# Altium PCB PogoBattPack.PcbDoc
Units mil, origin at the board's own origin, x right, y up, seen from the top; angles counter-clockwise.
Board outline 1250 x 3255.91 mil, 2 copper layers (Top Layer, Bottom Layer), stack 63.937 mil thick; 4 components, 6 nets, 21 pads, 22 vias.
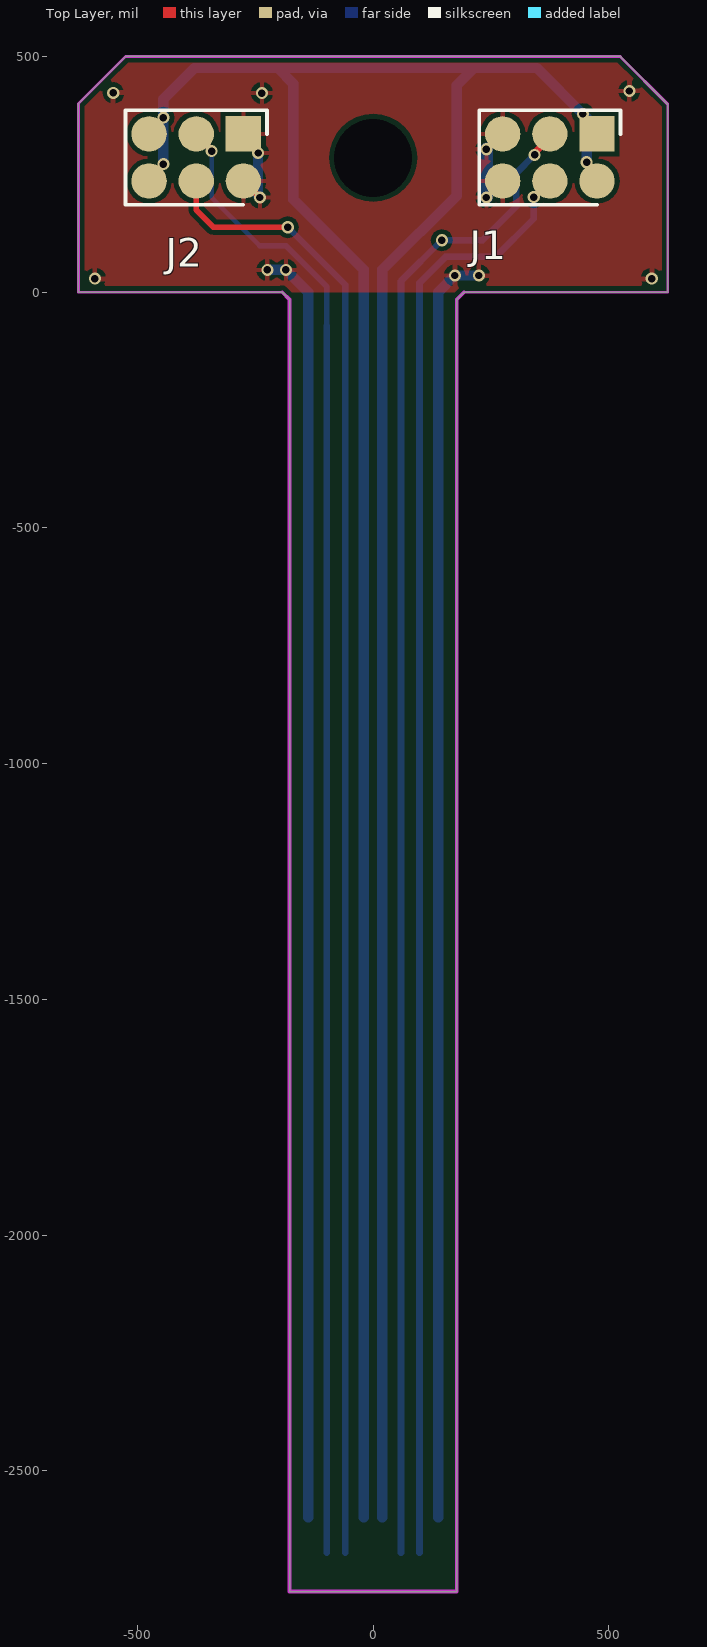
[diagram p0: Top Layer view]
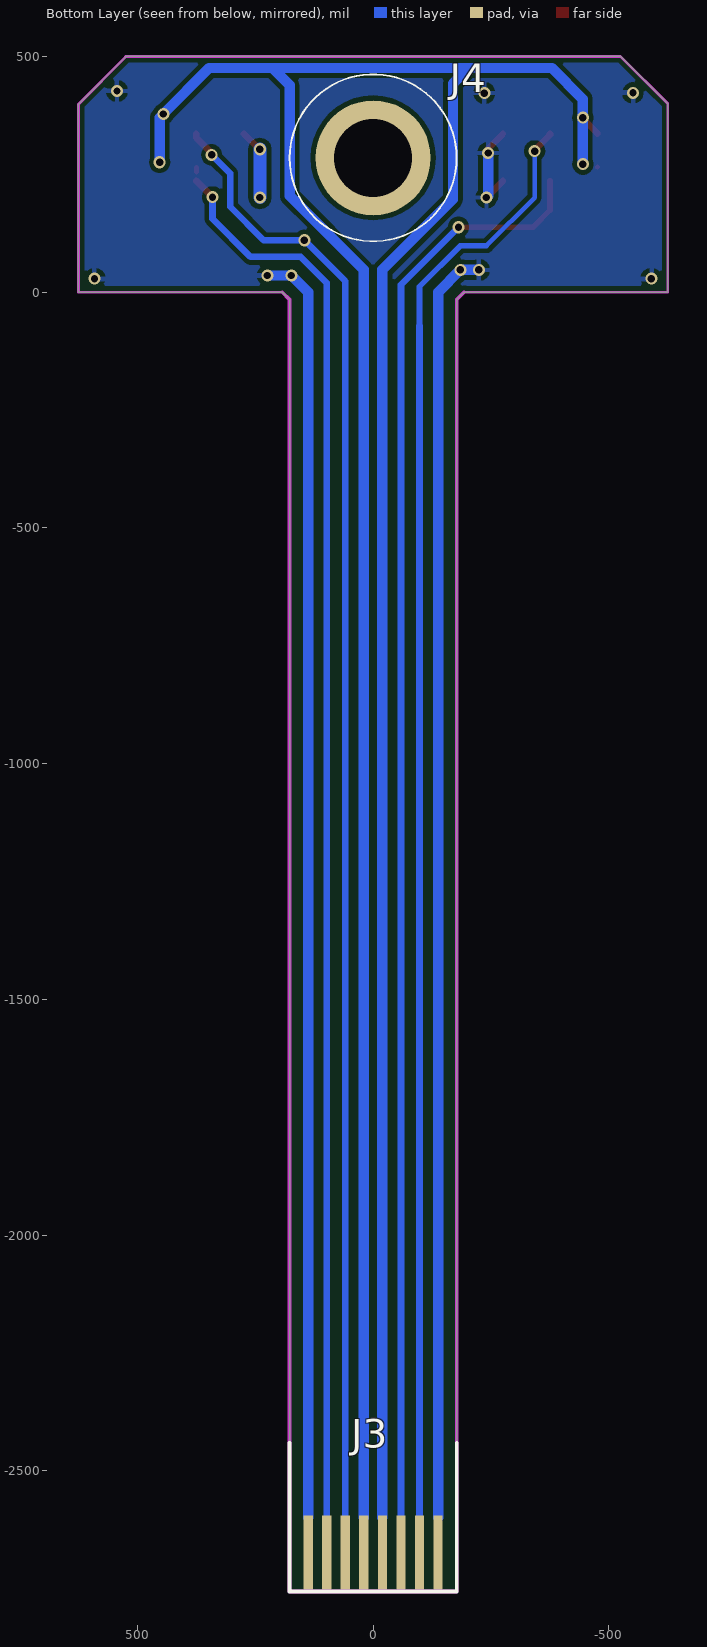
[diagram p1: Bottom Layer view, seen from below]

## Layer stack, top to bottom
Top Layer: signal copper 0.4724
Dielectric 1: core 62.992, Core-043, Dk 4.3
Bottom Layer: signal copper 0.4724

## Board outline
-625,0 -192.91,0 -177.17,-15.75 -177.17,-2755.91 177.17,-2755.91 177.17,-15.75 192.91,0 625,0 625,398.74 525,498.74 525,500 -525,500 -625,400
board region Rigid: -625,0 -625,400 -525,500 525,500 525,498.74 625,398.74 625,0
board region Flexible: 192.91,0 177.17,-15.75 177.17,-2755.91 -177.17,-2755.91 -177.17,-15.75 -192.91,0

## Design rules (kind name [scope] priority, off if disabled: settings)
Clearance [All] p1: gap=10 ignorepadtopadclearanceinfootprint=FALSE except(0: Arc-Hole Track-Hole SMDPad-Hole THPad-Hole Via-Hole Fill-Hole Poly-Hole Region-Hole Text-Hole; 8: Arc-Arc Arc-Track Arc-SMDPad Arc-THPad Track-Track Track-SMDPad Track-THPad SMDPad-SMDPad SMDPad-THPad)
PolygonConnect [All] p1: connectstyle=Relief reliefconductorwidth=10 reliefentries=4 polygonreliefangle="90 Angle" airgapwidth=10
RoutingVias [All] p1: holewidth=28 width=50 viastyle="Through Hole" minholewidth=28 minwidth=50 maxholewidth=28 maxwidth=50
SolderMaskExpansion [All] p1: expansion=4 istentingtop=FALSE
Width [All] p1: maxlimit=30 minlimit=12 preferedwidth=14 minimp=50.000000 maximp=50.000000 favimp=50.000000
30 further rules are at their usual default settings.

## Components (designator, comment, footprint, x,y, rotation, side; value= is the part's Value field where it differs from the comment)
J1 "823-22-006-10-004101" HDRV6W43P254_2X3_762X508X599P 474.8,335.75 r180 top locked
J2 "823-22-006-10-004101" HDRV6W43P254_2X3_762X508X599P -275.2,335.75 r180 top locked
J3 "FPC-8PIN" FPC-PCB-8PIN 0,-2673.23 r0 bottom
J4 "SMTSO-440-4ET" SMTSO-440-4ET 0,285 r180 bottom locked

## Footprints (in the part's own frame and the unit in brackets; to place one, negate y for a bottom-side part, rotate by r counter-clockwise, add the part's x,y. Pads: shape width x height; smd on the part's side, far side on the other; paste and mask are expansions set on the pad)
FPC-PCB-8PIN [mm]
  rect 0.5x4 smd: 1(-3.5,0) 2(-2.5,0) 3(-1.5,0) 4(-0.5,0) 5(0.5,0) 6(1.5,0) 7(2.5,0) 8(3.5,0)
  Keep-Out Layer lines w0.203: -4.5,-5.9 -4.5,2.1 4.5,2.1 4.5,-5.9
  silkscreen extent -4.5,-5.9 4.5,2.1
HDRV6W43P254_2X3_762X508X599P [mil]
  rect 75x75 smd: 1(0,0)
  round 75 smd: 2(0,100) 3(100,0) 4(100,100) 5(200,0) 6(200,100)
  silkscreen extent -50,-50 250,150, body extent -52,-50 248,150, height 141
SMTSO-440-4ET [mm]
  round 6.198 / inner round 0 / far side round 0 hole 4.2 unplated: 2(0,0)
  silkscreen extent -4.5,-4.5 4.5,4.5, body extent -2.79,-2.79 2.79,2.79, height 4

## Part data
J1 J2: "Connector", Manufacturer_Name=Mill-Max, Mouser Part Number=575-8232200610004101, Arrow Part Number=823-22-006-10-004101, Arrow Price/Stock=https://www.arrow.com/en/products/8232200610004101/mill-max, Datasheet Link=https://www.arrow.com/en/products/8232200610004101/mill-max, Height=5.994mm, Manufacturer_Part_Number=823-22-006-10-004101, Mouser Price/Stock=https://www.mouser.co.uk/ProductDetail/Mill-Max/823-22-006-10-004101?qs=iJx90KzHWBqGX45BMLpjyA%3D%3D
J3: library part "Header 8", "Header, 8-Pin", LatestRevisionDate=17-Jul-2002, LatestRevisionNote="Re-released for DXP Platform.", Publisher="Altium Limited"
J4: "Connector", Manufacturer_Name="Wurth Elektronik", Manufacturer_Part_Number=746600330R, Mouser Part Number=710-746600330R, Datasheet Link=https://www.mouser.com/datasheet/2/445/746600330R-1095622.pdf, Height=4mm, Mouser Price/Stock=https://www.mouser.co.uk/ProductDetail/Wurth-Elektronik/746600330R?qs=lBTPRtX1sU8mwfQdkSz5%2FQ%3D%3D

## Via types
v1: diameter 25.59, hole 15.75, Top Layer to Bottom Layer, tented both sides, 21 vias
v2: diameter 25.59, hole 15.75, Top Layer to Bottom Layer, 1 vias

## Nets (pads, with @x,y where several pads share a name; then routed paths per layer and width w, separated by ;. In a path a pad name is that pad's centre, name@x,y a point inside that pad or via, vN(x,y) a via of type N, cw(c..) or ccw(c..) an arc to the next point about the centre after c; other vN are vias at no path point)
BAT_NTC: J1.4 J3.7 | length 3096
  Top Layer w10: J1.4@374.8,254.65 J1.4@374.8,264.88
  Top Layer w14: v1(340.71,201.65) J1.4
  Bottom Layer w14: J3.7 98.43,19.68 153.54,74.8 259.84,74.8 340.71,155.67 v1(340.71,201.65)
GND: J1.5 J1.6 J2.1 J2.2 J3.1 J3.8 | length 5753.8
  Top Layer w14: J2.1 -244.7,305.25 -244.7,295.88 v1(-244.09,295.28) ; J2.2 v1(-240.16,200.79) ; v1(240.16,303.15) 241.18,303.15 273.78,335.75 J1.5
  Bottom Layer w22: v1(-244.09,295.28) -244.09,204.72 v1(-240.16,200.79) ; v1(-224.41,47.24) v1(-185.04,47.24) -137.8,0 J3.1@-137.8,-2598.43 ; J3.8@137.8,-2598.43 137.8,-31.5 137.8,0 v1(173.23,35.43) v1(224.41,35.43)
  Bottom Layer w28: v1(240.16,200.79) v1(240.16,303.15)
  other v1: -590.16,28.66 590.94,28.66 -551.18,422.8 -235.83,422.36 543.31,426.73
SCL_Main: J2.4 J3.3 | length 3132.3
  Top Layer w12: J2.4 -375.2,174.23 -338.76,137.8 v1(-181.1,137.8)
  Bottom Layer w14: v1(-181.1,137.8) -59.06,15.75 J3.3
SDA_Main: J2.3 J3.2 | length 3155.9
  Top Layer w14: J2.3 -375.2,333.82 -342.52,301.14 v1(-342.52,299.21)
  Bottom Layer w10: v1(-342.52,299.21) -342.52,200.79 -240.16,98.43
  Bottom Layer w12: -240.16,98.43 -185.04,98.43 -98.43,11.81 -98.43,-70.87
  Bottom Layer w14: J3.2 -98.43,-70.87
TBD: J1.3 J3.6 | length 3190.5
  Top Layer w14: v1(342.52,291.34) 342.52,295.01 374.8,327.29 J1.3
  Bottom Layer w14: J3.6 59.06,23.62 v2(145.67,110.24) 232.28,110.24 303.15,181.1 303.15,251.97 v1(342.52,291.34)
VBAT: J1.1 J1.2 J2.5 J2.6 J3.4 J3.5 | length 7552.8
  Top Layer w10: J2.6@-475.78,265.46 J2.6@-475.2,264.88
  Top Layer w14: J2.5 -475.2,337.76 -444.88,368.07 v1(-444.88,370.08)
  Bottom Layer w22: v1(-444.88,271.65) v1(-444.88,370.08) -444.88,409.45 -378.77,475.56 -202.28,475.56 ; J3.4@-19.69,-2598.43 -19.69,-94.49 -19.69,47.24 -169.29,196.85 -169.29,442.57 -202.28,475.56 ; J3.5@19.68,-2598.43 19.69,-165.35 19.69,47.24 177.17,204.72 177.17,438.63 214.09,475.56 ; v1(452.76,275.59) 452.76,370.08 v1(444.88,377.95) 347.28,475.56 214.09,475.56 ; -202.28,475.56 214.09,475.56
pads on no net: J4.2

## Polygon pours and split planes (outlines as drawn)
GND on Top Layer "GND_L01_P000" (solid, pour order 0): -625,400 -625,0 625,0 625,398.74 525,500 -525,500
GND on Bottom Layer "GND_L02_P001" (solid, pour order 1): -525,500 -625,400 -625,0 625,0 625,398.74 525,500

## Keep-outs
Keep-Out Layer:
  the board outline again, w8

## Silkscreen, mask and mechanical layers (free items; w line width, h text height)
Mechanical 1:
  circle w0.5: c0,285 r31.25
  lines w0.5: -477.03,203.45 ccw(c-477.03,235) -477.03,266.55 ; -477.03,303.45 ccw(c-477.03,335) -477.03,366.55 ; -377.03,203.45 ccw(c-377.03,235) -377.03,266.55 ; -377.03,303.45 ccw(c-377.03,335) -377.03,366.55 ; -277.03,203.45 ccw(c-277.03,235) -277.03,266.55 ; -277.03,303.45 ccw(c-277.03,335) -277.03,366.55 ; 272.97,203.45 ccw(c272.97,235) 272.97,266.55 ; 272.97,303.45 ccw(c272.97,335) 272.97,366.55 ; 372.97,203.45 ccw(c372.97,235) 372.97,266.55 ; 372.97,303.45 ccw(c372.97,335) 372.97,366.55 ; 472.97,203.45 ccw(c472.97,235) 472.97,266.55 ; 472.97,303.45 ccw(c472.97,335) 472.97,366.55 ; -625,0 625,0 625,400 525,500 -525,500 -625,400 -625,0 ; -527.03,200.75 -520.73,200.75 -515,185 -439.06,185 -433.33,200.75 -420.73,200.75 -415,185 -339.06,185 -333.33,200.75 -320.73,200.75 -315,185 -239.06,185 -233.33,200.75 -227.03,200.75 -227.03,369.25 -233.33,369.25 -239.07,385 -315,385 -320.73,369.25 -333.33,369.25 -339.06,385 -415,385 -420.73,369.25 -433.33,369.25 -439.06,385 -515,385 -520.73,369.25 -527.03,369.25 -527.03,200.75 ; 222.97,200.75 229.27,200.75 235,185 310.94,185 316.67,200.75 329.27,200.75 335,185 410.94,185 416.67,200.75 429.27,200.75 435,185 510.93,185 516.67,200.75 522.97,200.75 522.97,369.25 516.67,369.25 510.93,385 435,385 429.27,369.25 416.67,369.25 410.94,385 335,385 329.27,369.25 316.67,369.25 310.94,385 235,385 229.27,369.25 222.97,369.25 222.97,200.75